# Altium PCB PCB_Layout.PcbDoc
Units mil, origin at the board's own origin, x right, y up, seen from the top; angles counter-clockwise.
Board outline 3140 x 2640 mil, 2 copper layers (Top Layer, Bottom Layer); 29 components, 40 nets, 138 pads, 10 vias.
Unrouted connection lines stored in the file: 1.
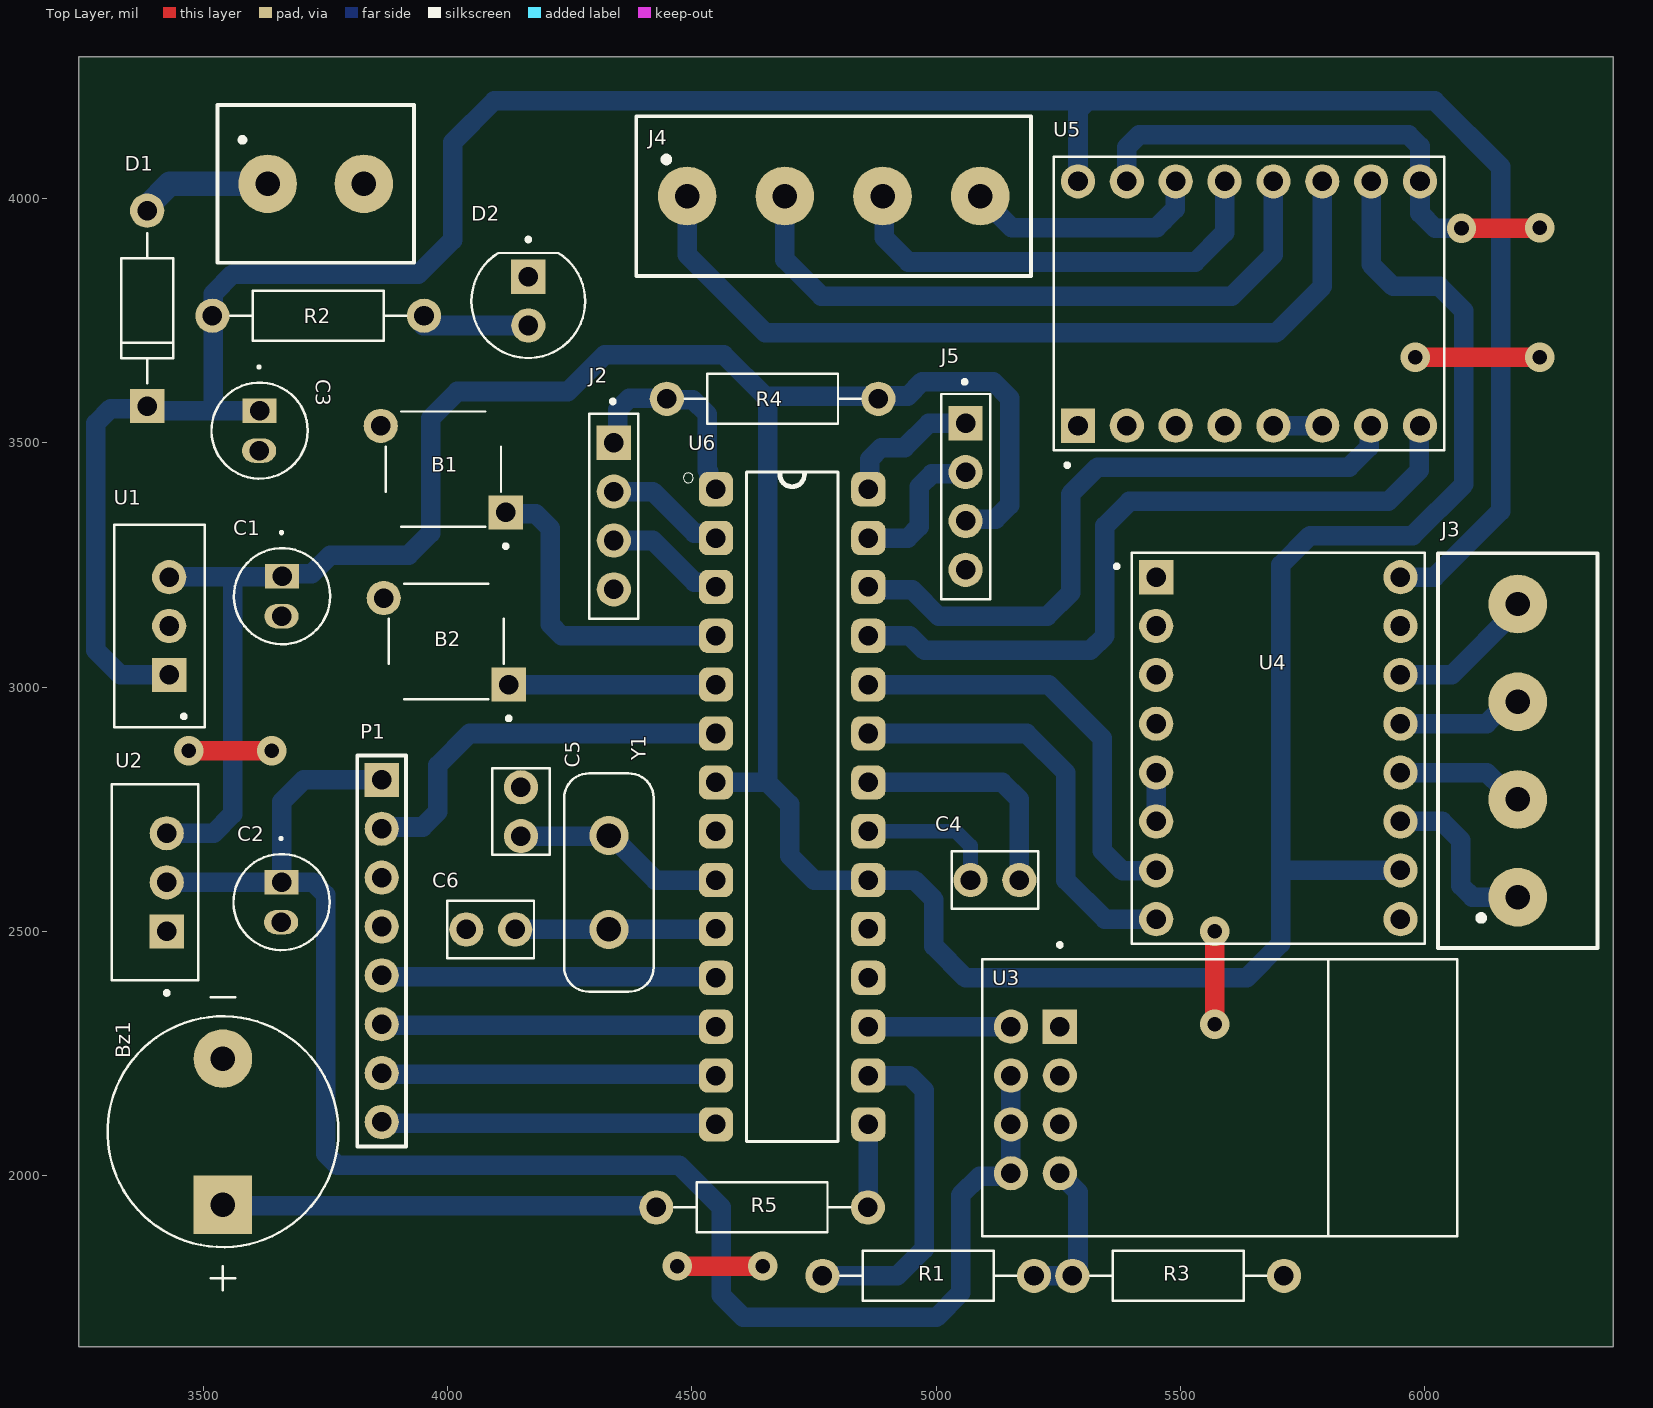
[diagram p0: Top Layer view]
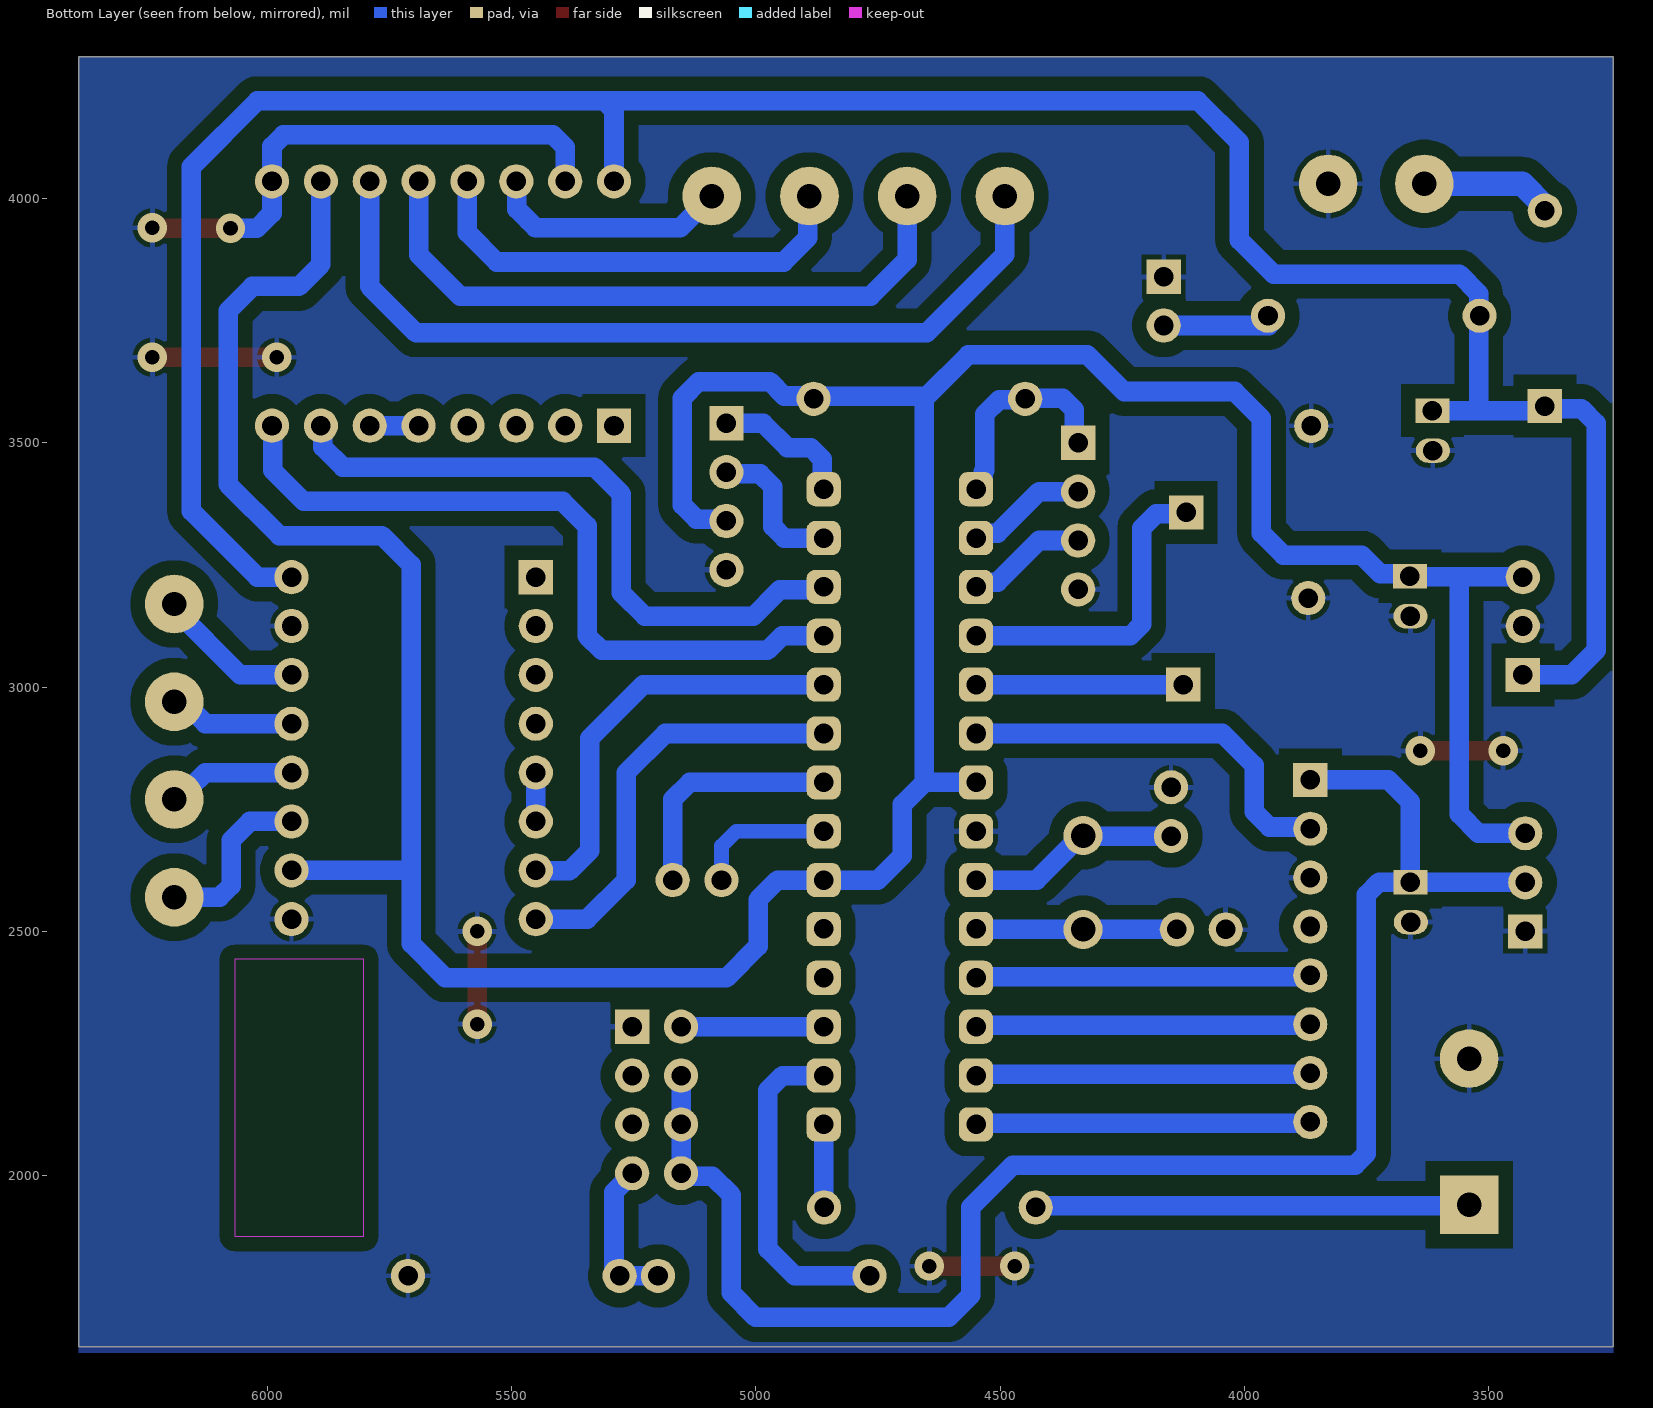
[diagram p1: Bottom Layer view, seen from below]
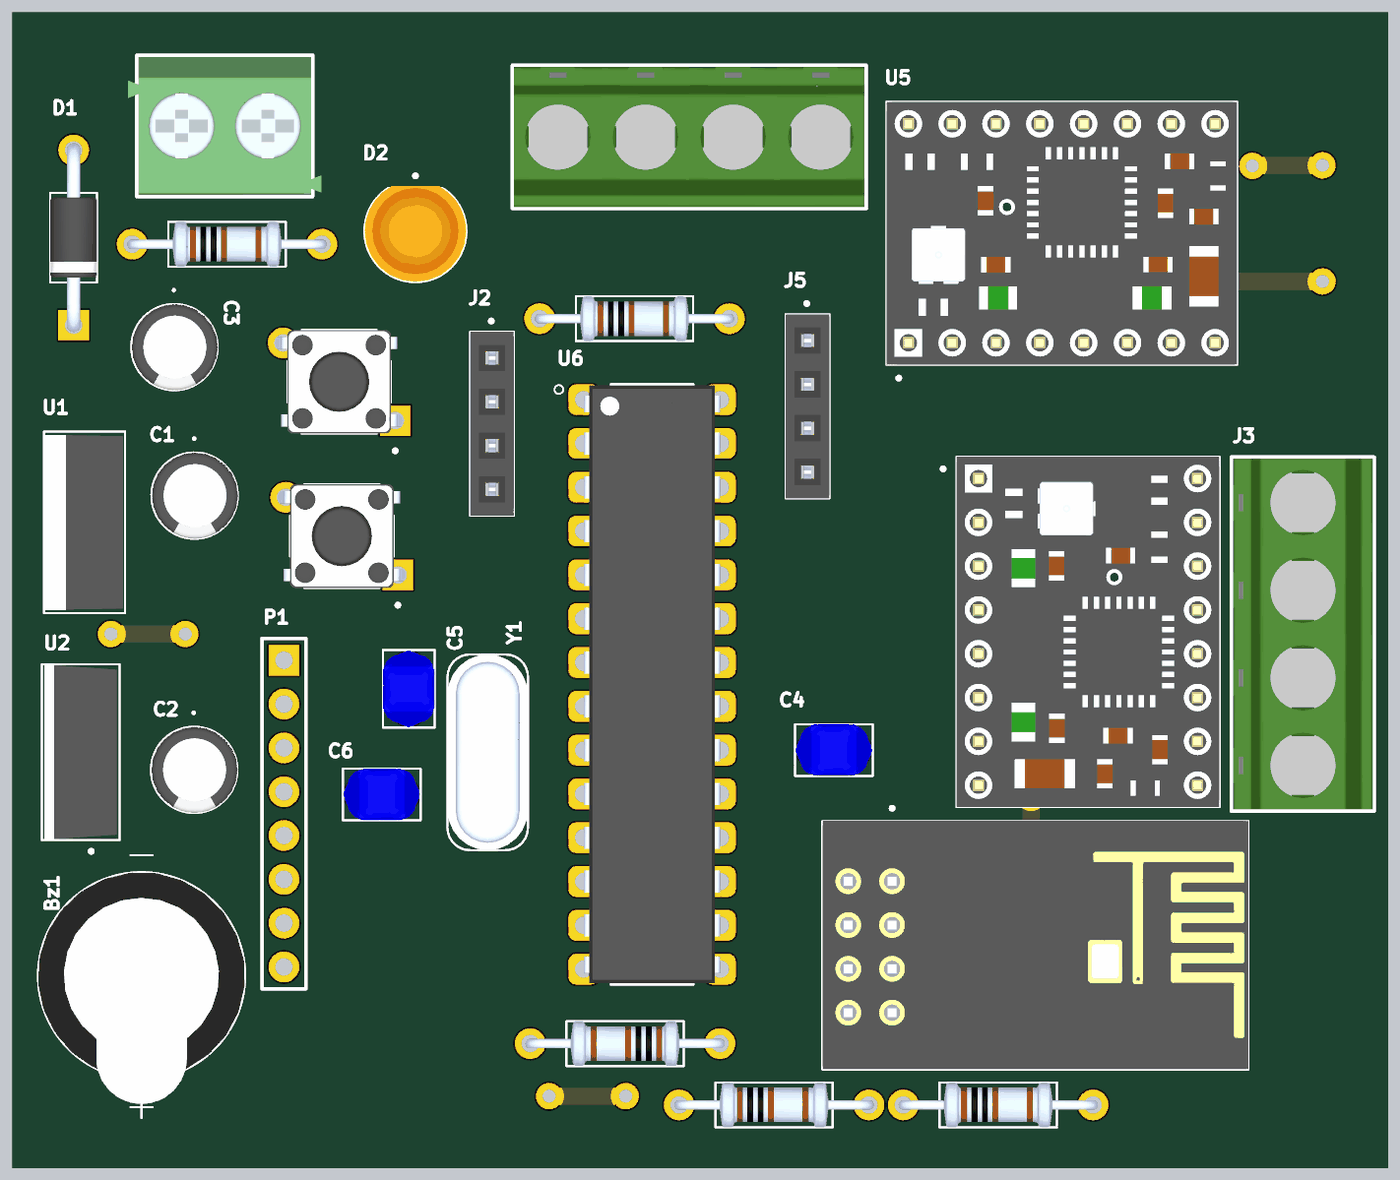
[diagram p2: 3D render of the assembled board from above, using the file's embedded part models]

## Layer stack, top to bottom
Top Solder: solder mask 0.4, Solder Resist, Dk 3.5
Top Layer: signal copper 1.4
Dielectric 1: dielectric 12.6, FR-4, Dk 4.8
Bottom Layer: signal copper 1.4
Bottom Solder: solder mask 0.4, Solder Resist, Dk 3.5

## Board outline
3245,1650 6385,1650 6385,4290 3245,4290

## Design rules (kind name [scope] priority, off if disabled: settings)
Clearance [All] p1: gap=30 ignorepadtopadclearanceinfootprint=FALSE
PolygonConnect [All] p1: connectstyle=Relief reliefconductorwidth=10 reliefentries=4 polygonreliefangle="90 Angle" airgapwidth=10
RoutingVias [All] p1: holewidth=30 width=60 viastyle="Through Hole" minholewidth=30 minwidth=60 maxholewidth=30 maxwidth=60
SolderMaskExpansion [All] p1: expansion=4 istentingtop=FALSE
Width [All] p1: maxlimit=50 minlimit=30 preferedwidth=40
30 further rules are at their usual default settings.

## Components (designator, comment, footprint, x,y, rotation, side; value= is the part's Value field where it differs from the comment)
B1 "Push button" SW_TS02-66-95-BK-260-LCR-D 3990.97,3445.97 r180 top
B2 "Push button" SW_TS02-66-95-BK-260-LCR-D 3997.05,3093.58 r180 top
Bz1 "AI-1223-TWT-12V-R" XDCR_AI-1223-TWT-12V-R 3540,2090 r180 top
C1 "10uF" CAPPRD500W50D500H1100 3661,3186 r270 top
C2 "10uF" CAPPRD500W50D500H1100 3660,2560 r270 top
C3 "1000uF" CAPPRD500W50D500H1100 3615,3525 r270 top
C4 "100nF" CAPRB500W50L450T300H550 5170,2605 r180 top
C5 "22pF" CAPRB500W50L450T300H550 4150,2795 r270 top
C6 "22pF" CAPRB500W50L450T300H550 4038.08,2503.94 r0 top
D1 "1N4007" DIOAD1060W80L520D270 3385,3775 r90 top
D2 "L08R5000Q1" LEDRD254W57D500H1070 4165,3790 r270 top
J1 "TBlock 2" 691111710002 3730,4030 r0 top
J2 "Header 4" SULLINS_PPTC041LFBN-RC 4340,3350 r270 top
J3 "TBlock 4" 691241510004 6190,2870 r90 top
J4 "TBlock 4" 691241510004 4790,4005 r0 top
J5 "Header 4" SULLINS_PPTC041LFBN-RC 5060,3390 r270 top
P1 "Header 8" HDR1X8 3865,2810 r270 top
R1 "1k1" RESAD1100W55L680D260 4983.46,1795 r180 top
R2 "1k" RESAD1100W55L680D260 3735,3760 r180 top
R3 "2k2" RESAD1100W55L680D260 5495,1795 r180 top
R4 "10k" RESAD1100W55L680D260 4665,3590 r180 top
R5 "1k" RESAD1100W55L680D260 4643.46,1935 r0 top
U1 "LM7805" TO254P1054X470X1955-3 3430,3125 r90 top
U2 "LD1117V33" TO255P1020X450X1968-3 3401.18,2600.39 r90 top
U3 "ESP8266-01/ESP-01" XCVR_ESP8266-01/ESP-01 5580,2155 r270 top
U4 "A4988" MODULE_A4988_STEPPER_MOTOR_DRIVER_CARRIER 5700,2875 r0 top
U5 "A4988" MODULE_A4988_STEPPER_MOTOR_DRIVER_CARRIER 5640,3785 r90 top
U6 "ATMEGA328P-PU" DIP794W46P254L2967H457Q28B 4705,2755 r0 top
Y1 "16MHz" XTAL_ECS-160-20-4X 4330,2600 r90 top

## Footprints (in the part's own frame and the unit in brackets; to place one, negate y for a bottom-side part, rotate by r counter-clockwise, add the part's x,y. Pads: shape width x height; smd on the part's side, far side on the other; paste and mask are expansions set on the pad)
691111710002 [mil]
  round 120 hole 50: 1(-98.43,0) 2(98.43,0)
  silkscreen extent -201,-161 201,161, body extent -220,-157 220,157, height 434
691241510004 [mil]
  round 120 hole 50 mask+0: 1(-300,0) 2(-100,0) 3(100,0) 4(300,0)
  silkscreen extent -404,-163 404,163, body extent -400,-160 400,159, height 394
CAPPRD500W50D500H1100 [mil]
  oval 50x70 hole 40: N(41,-1)
  rect 50x70 hole 40: P(-41,0)
  silkscreen extent -131,-98 98,98, body extent -108,-97 108,99, height 434
CAPRB500W50L450T300H550 [mil]
  round 70 hole 40: 1(0,0) 2(100,0)
  silkscreen extent -39,-59 139,59, body extent -38,-59 138,59, height 210
DIOAD1060W80L520D270 [mil]
  round 70 hole 40: A(200,0)
  rect 70x70 hole 40: C(-200,0)
  silkscreen extent -154,-53 154,53, body extent -216,-53 216,53, height 99
DIP794W46P254L2967H457Q28B [mil]
  rrect50% 70x70 hole 40: 1(-155.91,650) 2(-155.91,550) 3(-155.91,450) 4(-155.91,350) 5(-155.91,250) 6(-155.91,150) 7(-155.91,50) 8(-155.91,-50) 9(-155.91,-150) 10(-155.91,-250) 11(-155.91,-350) 12(-155.91,-450) 13(-155.91,-550) 14(-155.91,-650) 15(155.91,-650) 16(155.91,-550) 17(155.91,-450) 18(155.91,-350) 19(155.91,-250) 20(155.91,-150) 21(155.91,-50) 22(155.91,50) 23(155.91,150) 24(155.91,250) 25(155.91,350) 26(155.91,450) 27(155.91,550) 28(155.91,650)
  silkscreen extent -223,-685 94,685, body extent -156,-682 156,683, height 180
HDR1X8 [mil] "Connector; Header; 8 Position"
  rect 70x70 hole 40: 1(0,0)
  round 70 hole 40: 2(100,0) 3(200,0) 4(300,0) 5(400,0) 6(500,0) 7(600,0) 8(700,0)
  silkscreen extent -50,-50 750,50
LEDRD254W57D500H1070 [mil]
  round 70 hole 40: A(50,0)
  rect 70x70 hole 40: C(-50,0)
  silkscreen extent -130,-116 116,116, body extent -102,-116 116,116, height 358
MODULE_A4988_STEPPER_MOTOR_DRIVER_CARRIER [mil]
  rect 70x70 hole 40: 1(-250,350)
  round 70 hole 40: 2(-250,250) 3(-250,150) 4(-250,50) 5(-250,-50) 6(-250,-150) 7(-250,-250) 8(-250,-350) 9(250,-350) 10(250,-250) 11(250,-150) 12(250,-50) 13(250,50) 14(250,150) 15(250,250) 16(250,350)
  silkscreen extent -335,-400 300,400, body extent -300,-400 300,400, height 233
RESAD1100W55L680D260 [mil]
  round 70 hole 40: 1(-216.54,0) 2(216.54,0)
  silkscreen extent -180,-51 180,51, body extent -227,-51 227,51, height 101
SULLINS_PPTC041LFBN-RC [mil]
  rect 70x70 hole 40: 1(-150,0)
  round 70 hole 40: 2(-50,0) 3(50,0) 4(150,0)
  silkscreen extent -239,-50 210,50, body extent -210,-50 210,50, height 335
SW_TS02-66-95-BK-260-LCR-D [mm]
  rect 1.778x1.778 hole 1.016: 1(-3.25,2.25)
  round 0 all layers, no hole: 2(3.25,2.25) 3(-3.25,-2.25)
  round 1.778 hole 1.016: 4(3.25,-2.25)
  silkscreen extent -3.35,-3 3,4.1, body extent -3.95,-3 3.94,3, height 9.7
TO254P1054X470X1955-3 [mil]
  rect 70x70 hole 40: 1(-100,0)
  round 70 hole 40: 2(0,0) 3(100,0)
  silkscreen extent -207,-72 207,113, body extent -200,-68 200,113, height 770
TO255P1020X450X1968-3 [mil]
  rect 70x70 hole 40: 1(-100.39,-23.82)
  round 70 hole 40: 2(0,-23.82) 3(100.39,-23.82)
  silkscreen extent -230,-89 201,89, body extent -200,-82 200,83, height 900
XCVR_ESP8266-01/ESP-01 [mil]
  rect 70x70 hole 40: 1(-150,-327.17)
  round 70 hole 40: 2(-50,-327.17) 3(50,-327.17) 4(150,-327.17) 5(-150,-427.17) 6(-50,-427.17) 7(50,-427.17) 8(150,-427.17)
  Keep-Out Layer region: 279.13,222.44 -287.8,222.44 -287.8,486.22 279.13,486.22
  silkscreen extent -321,-486 279,486, body extent -288,-486 278,486, height 256
XDCR_AI-1223-TWT-12V-R [mil]
  round 120 hole 50: N(0,-149.61)
  rect 120x120 hole 50: P(0,149.61)
  silkscreen extent -236,-275 236,325, body extent -236,-236 236,293, height 376
XTAL_ECS-160-20-4X [mil]
  round 80 hole 50: 1(-96.06,0) 2(96.06,0)
  silkscreen extent -223,-92 223,92, body extent -223,-92 223,92, height 138

## Part data
Bz1: library part Buzzer, "ELECTRO-MECHANICAL AUDIO INDICATOR", Package="2225 PUI Audio", Availability="In Stock", MF="PUI Audio,", MP=AI-1223-TWT-12V-R, Price=None, Purchase-URL=https://pricing.snapeda.com/search/part/AI-1223-TWT-12V-R/?ref=eda
C1 C2 C3: library part "Electrolytic capacitor", "FS-A", Package=None, Availability=Unavailable, MF="{'manufacturer': u'Panasonic'}", MP=EEUFS0J221B, Price=None
C4 C5 C6: library part "Ceramic capacitor", "2200 pF Â±10% 250V Ceramic Capacitor X7R Radial", Package="Radial TDK", Check_prices=https://www.snapeda.com/parts/FG24X7R2E222KNT06/TDK/view-part/?ref=eda, Digi-Key_Part_Number=445-173386-1-ND, MF=TDK, MP=FG24X7R2E222KNT06, Purchase-URL=https://pricing.snapeda.com/search/part/FG24X7R2E222KNT06/?ref=eda, SnapEDA_Link=https://www.snapeda.com/parts/FG24X7R2E222KNT06/TDK/view-part/?ref=snap
D1: "Diode Switching 1KV 1A 2-Pin DO-41", Package=None, Availability=Unavailable, MP=1N4007, Price=None
D2: library part LED, "LED, Orange, Through Hole, T-1 3/4 (5mm), 30 mA, 2.1 V, 635 nm", Package=None, Availability=Unavailable, MF="{'manufacturer': u'LED Technology'}", MP=L08R5000Q1, Price=None
J1: library part "Terminal Block - 2Pins", "2 Position Wire to Board Terminal Block Horizontal with Board 0.197 _5.00mm_ Through Hole", Package=None, Availability=Unavailable, MF="Wurth Electronics", MP=691111710002, Price=None, SnapEDA_Link=https://www.snapeda.com/parts/691111710002/Wurth%20Electronics%20Inc./view-part/1195092/?ref=snap
J2 J5: library part "Female header - 4Pins", "4 Position Header Connector Through Hole", Package=None, Availability=Warning, Check_prices=https://www.snapeda.com/parts/PPTC041LFBN-RC/Sullins%20Connector%20Solutions/view-part/285917/?ref=eda, MF="Sullins Connector", MP=PPTC041LFBN-RC, Price=None, Purchase-URL=https://pricing.snapeda.com/search/part/PPTC041LFBN-RC/?ref=eda, SnapEDA_Link=https://www.snapeda.com/parts/PPTC041LFBN-RC/Sullins%20Connector%20Solutions/view-part/285917/?ref=snap
J3 J4: library part "Terminal block - 4Pins", "<b>WR-TBL Serie 2415 - 5.08 mm Horizontal Entry Modular w. Rising Cage Clamp</b> <br> <br><b> KIND PROPERTIES </b> <br><br> Pitch 5.08 mm  <br> <br> <b>MATERIAL PROPERTIES </b> <br> <br>Insulator Material PA66  <br>Insulator Flammability Rating UL94 V-0  <br>Terminal Screw Material Steel  <br>Terminal Screw Plating Zinc  <br>Wire Guard Material Copper Alloy  <br> <br> <b>GENERAL INFORMATION </b> <br> <br>Operating Temperature -30 up to +120 Â°C  <br>Compliance ROHS & Reach  <br><br> <b>ELECTRICAL PROPERTIES </b> <br> <br>IR UL 14 A  <br>IR VDE 24 A  <br>Working Voltage [UL] 300 V (AC)  <br>Working Voltage [VDE] 250 V (AC)  <br>Withstanding Voltage [UL] 1600 V (AC)  <br>Withstanding Voltage [VDE] 2000 V (AC)  <br>Contact Resistance 20 mÎ©  <br> <br> <b>MECHANICAL PROPERTIES </b> <br> <br>Wire Strip Length 6  <br>Screw M3  <br> <br> <b>CERTIFICATION </b> <br> <br>UL Approval E150931  <br>VDE Approval 40021365  <br> <br> <b>PACKAGING PROPERTIES </b> <br> <br>Packaging Box  <br> <br> <br><a href=\"https://www.we-online.com/catalog/media/o79416v209%20Family_WR-TBL_6912427000xx_6912425000xx.jpg\" title=\"Enlarge picture\"> <img src=\"https://www.we-online.com/catalog/media/o79416v209%20Family_WR-TBL_6912427000xx_6912425000xx.jpg\" width=\"320\"></a><p> Details see: <a href=\"https://www.we-online.com/catalog/en/TBL_5_08_2415_HORIZONTAL_ENTRY_W_RISING_CAGE_6912415100xx/\">https://www.we-online.com/catalog/en/TBL_5_08_2415_HORIZONTAL_ENTRY_W_RISING_CAGE_6912415100xx/</a><p>  </b>Updated by Ella Wu  2019-11-26<br> </b>2019(C) Wurth Elektronik", Package=None, Availability="In Stock", Check_prices=https://www.snapeda.com/parts/691241510004/Wurth+Electronics+Inc./view-part/?ref=eda, MF="WÃ¼rth Elektronik", MP=691241510004, Price=None, Purchase-URL=https://pricing.snapeda.com/search/part/691241510004/?ref=eda, SnapEDA_Link=https://www.snapeda.com/parts/691241510004/Wurth+Electronics+Inc./view-part/?ref=snap
P1: "Header, 8-Pin", LatestRevisionDate=17-Jul-2002, LatestRevisionNote="Re-released for DXP Platform.", Publisher="Altium Limited"
R1 R2 R3 R4 R5: library part "Resistor (0.25W)", "(MFR-25FBF52-10K) 10,2 kOhm bei 1% 0,25W, 1/4W Durchbohrlochwiderstand Axial Metal Film", Package="Axial Yageo", Digi-Key_Part_Number=10.2KXBK-ND, MF=Yageo, MP=MFR-25FBF52-10K, Purchase-URL=https://pricing.snapeda.com/search/part/MFR-25FBF52-10K/?ref=eda, SnapEDA_Link=https://www.snapeda.com/parts/MFR-25FBF52-10K/Yageo/view-part/424333/?ref=snap
U1 U2: Package=None, Availability=Unavailable, Price=None
  U1: MP=LM7805CT/NOPB
  U2: MP=LD1117V33
U3: library part "ESP8266-01 Module", "MakerFocus 4pcs ESP8266 ESP-01 Serial Wireless WiFi Transceiver Receiver Module 1MB SPI Flash DC3.0-3.6V Internet of Things WiFi Module Board Compatible with Ar duino", Package=None, Availability=Unavailable, MP=ESP8266-01/ESP-01, Price=None
U4 U5: library part A4988_STEPPER_MOTOR_DRIVER_CARRIER, "Stepper motor controler; IC: A4988; 1A; Uin mot: 8Ã·35V", Package=None, Availability=Unavailable, MP=A4988_STEPPER_MOTOR_DRIVER_CARRIER, Price=None
U6: "ATmega Series 20 MHz 32 KB Flash 2 KB SRAM 8-Bit Microcontroller - DIP-28", Package=None, Availability=Unavailable, MP=ATMEGA328P-PU, Price=None
Y1: library part "Crystal oscilator", "CRYSTAL T/H", Package=None, Availability=Unavailable, MF="{'manufacturer': u'ECS Inc.'}", MP=ECS-160-S-4, Price=None

## Via types
v1: diameter 60, hole 30, Top Layer to Bottom Layer, 10 vias

## Nets (pads, with @x,y where several pads share a name; then routed paths per layer and width w, separated by ;. In a path a pad name is that pad's centre, name@x,y a point inside that pad or via, vN(x,y) a via of type N, cw(c..) or ccw(c..) an arc to the next point about the centre after c; other vN are vias at no path point)
+3V3: C2.P P1.1 U2.2 U3.6 U3.7 U3.8 | length 3340
  Bottom Layer w40: U2.2 3425.3,2600.7 3659.7,2600.7 C2.P ; P1.1 3705,2810 3660,2765 C2.P ; U3.6 U3.7 U3.8 5147.09,1999.26 5089.26,1999.26 5050,1960 5050,1760 5000,1710 4605,1710 4560,1755 4560,1935 4473.43,2021.57 3773.43,2021.57 3750,2045 3750,2575 3724,2601 C2.P
+12: C3.P D1.C R2.2 U1.1 U4.16 U5.16 | length 6222.9
  Bottom Layer w40: D1.C@3385,3570 3310,3570 3280,3540 3280,3075 3330,3025 U1.1 ; D1.C@3385.34,3566 3520,3566 C3.P ; R2.2@3516.93,3760 3520.37,3763.44 3520.37,3805.37 3560,3845 3940,3845 4010,3915 4010,4114.68 4095.32,4200 5310,4200 ; 3520,3570 R2.2@3520,3758.46 ; U5.16 5290,4180 5300.12,4190.12 5310,4200 ; U4.16@5951.23,3225 6020,3225 6155,3360 6155,4065 6020,4200 ; 6155.12,3360.12 6155.12,4064.88 6020,4200 ; 5310,4200 6020,4200
button1: B1.1 U6.4 | length 649.9
  Bottom Layer w40: B1.1 4121.31,3355 4180,3355 4210,3325 4210,3128.43 4233.43,3105 U6.4
button2: B2.1 U6.5 | length 424.1
  Bottom Layer w40: B2.1 U6.5
buzzer: R5.2 U6.15 | length 170.4
  Bottom Layer w40: R5.2 4860.45,1935.45 4860.45,2104.55 U6.15
clock: P1.7 U6.13 | length 685.1
  Bottom Layer w40: P1.7@3865,2207.5 4546.59,2207.5 U6.13
dir_steper1: U4.8 U6.23 | length 875.4
  Bottom Layer w40: U6.23 5185,2905 5265,2825 5265,2605 5345,2525 U4.8
dir_steper2: U5.8 U6.25 | length 1516.6
  Bottom Layer w40: U6.25 4946.01,3105 4976.01,3075 5315,3075 5345,3105 5345,3330 5395,3380 5925,3380 5988.78,3443.78 5988.78,3533.78 U5.8
esp_rx: R1.2 U6.16 | length 682.4
  Bottom Layer w40: R1.2 4920,1795 4975,1850 4975,2175 4945,2205 U6.16
esp_tx: U3.5 U6.17 | length 291.9
  Bottom Layer w40: U6.17 U3.5
GND: B1.4 B2.4 Bz1.N C1.N C2.N C3.N C4.1 C5.1 C6.1 D2.C J1.2 J2.4 J5.4 P1.3 R3.1 U1.2 U2.1 U3.1 U4.9 U4.15 U5.9 U5.15 U6.8 U6.22 | length 2363.9
  Top Layer w40: v1(3470,2870) v1(3640,2870) ; v1(4470,1815) v1(4645,1815) ; v1(5570,2310) v1(5570,2500) ; v1(5980,3675) v1(6235.12,3675) ; v1(6075,3938.83) 6075.59,3939.41 6234.53,3939.41 v1(6235.12,3940)
  Bottom Layer w40: U6.22 5135,2805 5170,2770 C4.1 ; U5.15 5390,4105 5415,4130 5966.57,4130 5990,4106.57 5990,3970 6021.17,3938.83 v1(6075,3938.83)
MISO: P1.6 U6.12 | length 686.2
  Bottom Layer w40: P1.6 3867.5,2307.5 4546.59,2307.5 U6.12
MOSI: P1.5 U6.11 | length 686.2
  Bottom Layer w40: P1.5 3867.5,2407.5 4546.59,2407.5 U6.11
NetBz1_P: Bz1.P R5.1 | length 891.2
  Bottom Layer w40: Bz1.P@3540,1945.39 3546.57,1938.83 4423.1,1938.83 R5.1
NetC4_2: C4.2 U6.21 | length 291.5
  Bottom Layer w30: U6.21 5040,2705 5070,2675 C4.2
NetD1_A: D1.A J1.1 | length 265.8
  Bottom Layer w50: D1.A@3385,3983.66 3431.34,4030 J1.1
NetD2_A: D2.A R2.1 | length 215
  Bottom Layer w40: R2.1@3950,3740 D2.A
NetJ3_1: J3.1 U4.11 | length 358.6
  Bottom Layer w40: U4.11 6035,2725 6073.75,2686.25 6073.75,2593.43 6097.18,2570 J3.1
NetJ3_2: J3.2 U4.12 | length 257.5
  Bottom Layer w40: U4.12@5949.55,2825 U4.12 6126.57,2825 6159.65,2791.92 6181.92,2791.92 J3.2@6190,2800
NetJ3_3: J3.3 U4.13 | length 258.6
  Bottom Layer w40: U4.13 6126.57,2925 6171.57,2970 J3.3
NetJ3_4: J3.4 U4.14 | length 305.9
  Bottom Layer w40: U4.14 6055,3025 6190,3160 J3.4
NetJ4_1: J4.1 U5.11 | length 1740.6
  Bottom Layer w40: J4.1 4490,3885 4650,3725 5695,3725 5790,3820 U5.11
NetJ4_2: J4.2 U5.12 | length 1346.3
  Bottom Layer w40: J4.2 4690,3875 4765,3800 5605,3800 5690,3885 U5.12
NetJ4_3: J4.3 U5.13 | length 933.8
  Bottom Layer w40: J4.3 4893.88,4001.12 4893.88,3919.17 4943.05,3870 5530,3870 5590,3930 U5.13
NetJ4_4: J4.4 U5.14 | length 498.8
  Bottom Layer w40: J4.4 5155,3940 5415.21,3940 5415.4,3940.19 5450.66,3940.19 5465.35,3954.88 5488.78,3978.31 5488.78,4033.78 U5.14
NetR1_1: R1.1 R3.2 U3.4 | length 308.6
  Bottom Layer w40: R1.1 R3.2 5278.46,1800.41 5290,1811.95 5290,1966.57 5252.83,2003.73 U3.4
NetU4_5: U4.5 U4.6 | length 100
  Bottom Layer w40: U4.6 U4.5
NetU5_5: U5.5 U5.6 | length 100
  Bottom Layer w40: U5.5 U5.6
reset: J2.1 R4.2 U6.1 | length 436.7
  Bottom Layer w40: J2.1 4348.28,3508.28 4348.28,3568.03 4371.72,3591.46 R4.2@4447,3591.46 ; R4.2 4449.93,3588.54 4501.35,3588.54 4531.51,3558.37 4531.51,3443.43 4534.09,3440.85 4534.09,3420 U6.1
rfid_reset: P1.2 U6.6 | length 820.5
  Bottom Layer w40: P1.2 3868.65,2713.65 3948.65,2713.65 3980,2745 3980,2840 4045,2905 U6.6
rfid_selector: P1.8 U6.14 | length 685.1
  Bottom Layer w40: P1.8@3865,2107.5 4546.59,2107.5 U6.14
rx: J2.3 U6.3 | length 248.4
  Bottom Layer w40: J2.3 4420,3300 4505,3215 4539.09,3215 U6.3
SCL: J5.1 U6.28 | length 289.3
  Bottom Layer w40: U6.28 4863.94,3408.03 4863.94,3466.57 4887.37,3490 4935,3490 4985,3540 J5.1
SDA: J5.2 U6.27 | length 302.8
  Bottom Layer w40: U6.27 4941.57,3305 4965,3328.43 4965,3410 4991.17,3436.17 5056.17,3436.17 J5.2
step_steper1: U4.7 U6.24 | length 881.8
  Bottom Layer w40: U6.24 5230,3005 5340,2895 5340,2665 5381.28,2623.72 U4.7@5450,2623.72
step_steper2: U5.7 U6.26 | length 1351.8
  Bottom Layer w40: U6.26 4866.89,3199.01 4950.99,3199.01 5005,3145 5227.05,3145 5275,3192.95 5275,3395 5330,3450 5845,3450 5886.13,3491.13 U5.7@5886.13,3531.13
tx: J2.2 U6.2 | length 248.4
  Bottom Layer w40: J2.2 4420,3400 4505,3315 4539.09,3315 U6.2
VCC: C1.P J5.3 R4.1 U1.3 U2.3 U4.10 U5.10 U6.7 U6.20 | length 7547.1
  Bottom Layer w40: U2.3 3520.79,2700.79 3560,2740 3560,3226 ; U1.3 3431,3226 3560,3226 ; U6.7 4655,2805 ; J5.3 5063.83,3343.83 5121.57,3343.83 5150,3372.26 5150,3591.57 5116.57,3625 4971.01,3625 4941.75,3595.74 4887.28,3595.74 R4.1 4876.54,3595 4655,3595 ; U5.10 5890,3865 5935,3820 6030,3820 6080,3770 6080,3415 5975,3310 5765,3310 5705,3250 5705,2625 ; U4.10 5705,2625 ; 3560,3226 3660,3226 C1.P 3666,3232 3722,3232 3760,3270 3920,3270 3965,3315 3965,3550 4020,3605 4246.01,3605 4321.01,3680 4565,3680 4650,3595 4655,3595 ; 4655,2805 4655,3595 ; 4655,2805 4700,2760 4700,2655 4750,2605 U6.20 4955,2605 4995,2565 4995,2470 5060,2405 5635,2405 5705,2475 5705,2625
xtal1: C5.2 U6.9 Y1.2 | length 436.9
  Bottom Layer w40: C5.2@4149.43,2695 4335,2695 4425,2605 U6.9
xtal2: C6.2 U6.10 Y1.1 | length 410
  Bottom Layer w40: C6.2 Y1.1 U6.10@4548.05,2503.96
pads on no net: B1.2 B1.3 B2.2 B2.3 P1.4 U3.2 U3.3 U4.1 U4.2 U4.3 U4.4 U5.1 U5.2 U5.3 U5.4 U6.18 U6.19

## Polygon pours and split planes (outlines as drawn)
GND on Bottom Layer "NONET_L02_P-001" (solid, remove dead copper, pour order 0): 3245.43,4290 3245.43,1637.65 6385.43,1637.65 6385.43,4290